# Altium PCB PCB2.PcbDoc
Units mil, origin at the board's own origin, x right, y up, seen from the top; angles counter-clockwise.
Board outline 5905.51 x 3149.61 mil, 2 copper layers (Top Layer, Bottom Layer); 28 components, 86 nets, 114 pads, 2 vias.
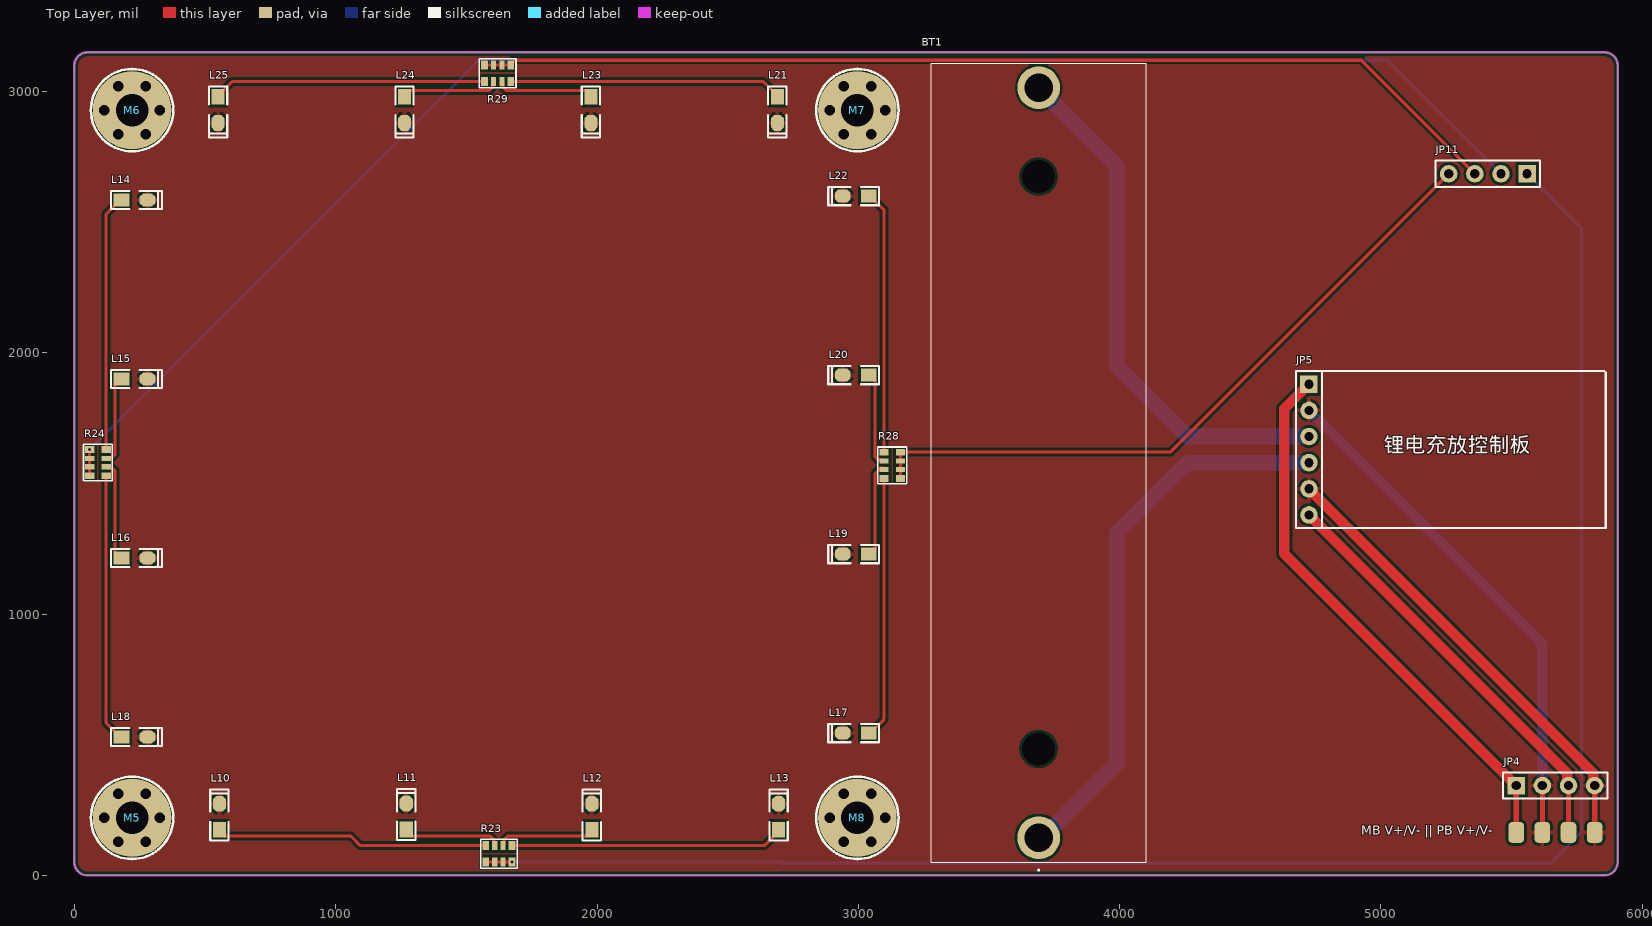
[diagram p0: Top Layer view]
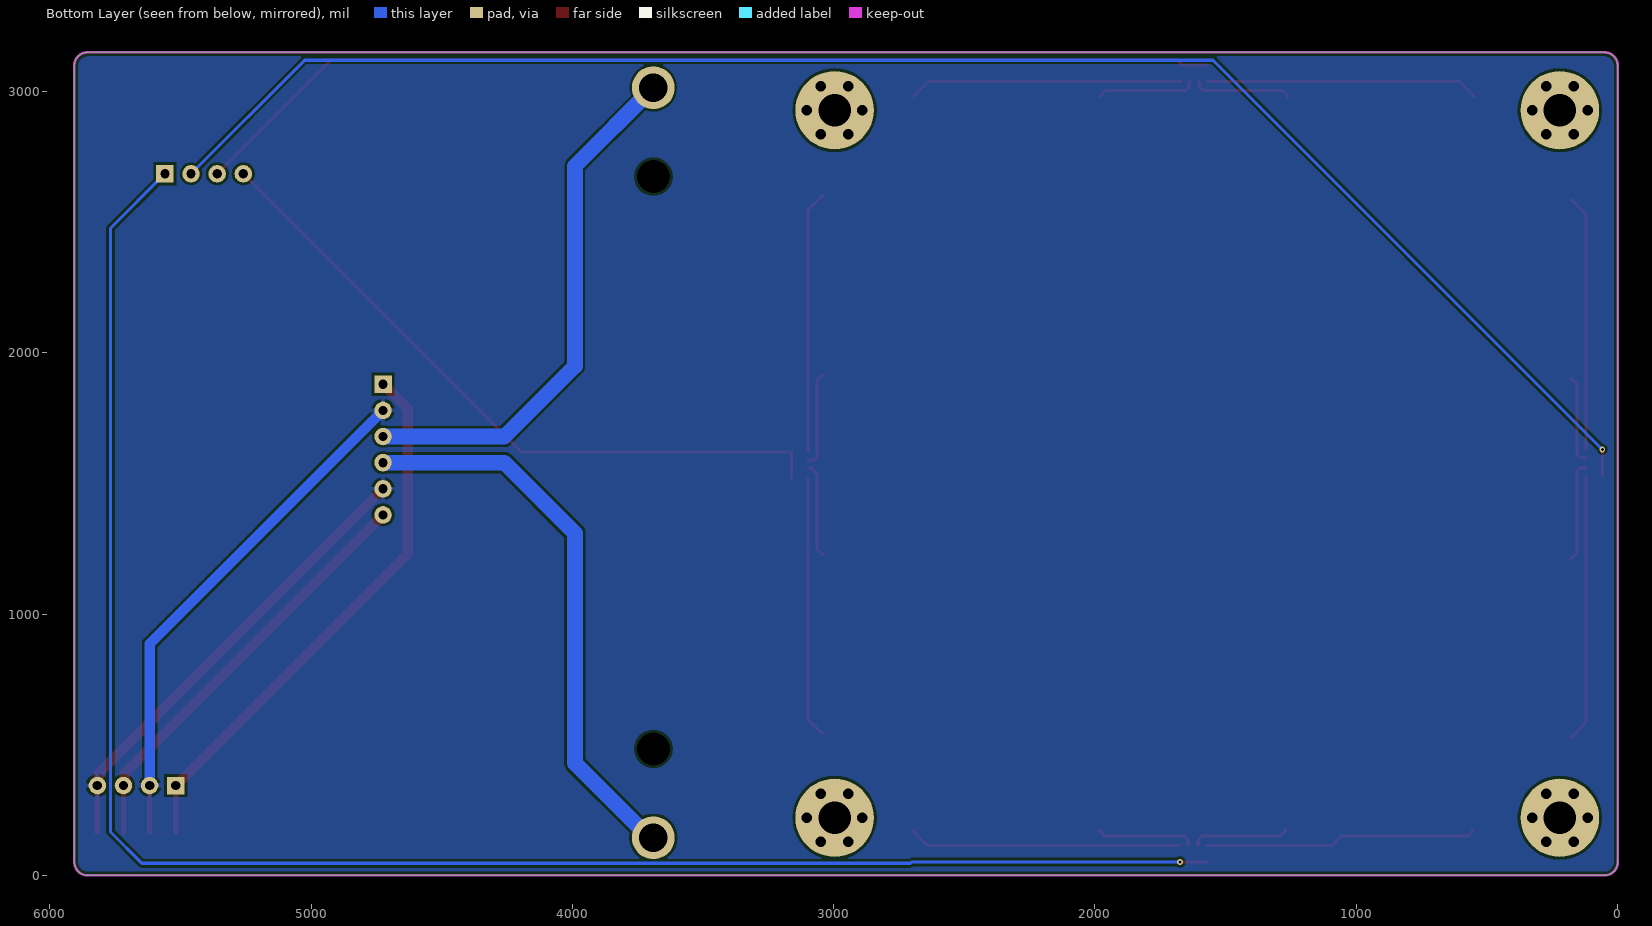
[diagram p1: Bottom Layer view, seen from below]

## Layer stack, top to bottom
Top Solder: solder mask 0.4, Solder Resist, Dk 3.5
Top Layer: signal copper 1.4
Dielectric 1: dielectric 12.6, FR-4, Dk 4.8
Bottom Layer: signal copper 1.4
Bottom Solder: solder mask 0.4, Solder Resist, Dk 3.5

## Board outline
50,0.39 cw(c50,50.39) 0,50.39 0,3100 cw(c50,3100) 50,3150 5855.51,3150 cw(c5855.51,3100) 5905.51,3100 5905.51,50.61 5905.3,50.39 cw(c5855.3,50.39) 5855.3,0.39

## Design rules (kind name [scope] priority, off if disabled: settings)
Clearance [All] p1: gap=10 ignorepadtopadclearanceinfootprint=FALSE except(0: Arc-Hole Track-Hole SMDPad-Hole THPad-Hole Via-Hole Fill-Hole Poly-Hole Region-Hole Text-Hole)
PolygonConnect [All] p1: connectstyle=Relief reliefconductorwidth=16 reliefentries=4 polygonreliefangle="90 Angle" airgapwidth=10
RoutingVias [All] p1: holewidth=28 width=50 viastyle="Through Hole" minholewidth=28 minwidth=50 maxholewidth=28 maxwidth=50
SolderMaskExpansion [All] p1: expansion=4
Width [All] p1: maxlimit=60 minlimit=10 preferedwidth=12
30 further rules are at their usual default settings.

## Components (designator, comment, footprint, x,y, rotation, side; value= is the part's Value field where it differs from the comment)
BT1 "18650" 18650_battery 3690,144.65 r90 top
JP4 "HDR-1X4" HDR2.54-M-LI-4P 5667.56,344.41 r0 top
JP5 "HDR-1X6" HDR2.54-M-LI-6P 4724.41,1630 r270 top
JP11 "HDR-1X4" HDR2.54-LI-4P 5409.06,2685.43 r180 top
L10 "LED" "LED 0805G" 555,224.65 r90 top
L11 "LED" "LED 0805G" 1270,225.88 r90 top
L12 "LED" "LED 0805G" 1980,224.65 r90 top
L13 "LED" "LED 0805G" 2695,224.65 r90 top
L14 "LED" "LED 0805G" 230,2585 r0 top
L15 "LED" "LED 0805G" 230,1900 r0 top
L16 "LED" "LED 0805G" 230,1215 r0 top
L17 "LED" "LED 0805G" 2989.72,545 r180 top
L18 "LED" "LED 0805G" 230,530 r0 top
L19 "LED" "LED 0805G" 2989.72,1230 r180 top
L20 "LED" "LED 0805G" 2989.72,1915 r180 top
L21 "LED" "LED 0805G" 2690,2930 r270 top
L22 "LED" "LED 0805G" 2989.72,2600 r180 top
L23 "LED" "LED 0805G" 1976.67,2930 r270 top
L24 "LED" "LED 0805G" 1263.33,2930 r270 top
L25 "LED" "LED 0805G" 550,2930 r270 top
M5 "M3" M3x20_N 220.83,220.81 r0 top
M6 "M3" M3x20_N 220.83,2928.77 r0 top
M7 "M3" M3x20_N 2996.43,2928.77 r0 top
M8 "M3" M3x20_N 2996.43,220.81 r0 top
R23 "103" RCA-8P4R-0603 1624.25,83.15 r0 top
R24 "103" RCA-8P4R-0603 90,1580 r270 top
R28 "103" RCA-8P4R-0603 3130,1570 r90 top
R29 "103" RCA-8P4R-0603 1620,3070 r180 top

## Footprints (in the part's own frame and the unit in brackets; to place one, negate y for a bottom-side part, rotate by r counter-clockwise, add the part's x,y. Pads: shape width x height; smd on the part's side, far side on the other; paste and mask are expansions set on the pad)
18650_battery [mm] "小糖豆的小窝窝 https://item.taobao.com/item.htm?ft=t&id=613637044352"
  round 4.155 hole 2.77: 1(0,0) 2(72.9,0)
  round 1.6 hole 3.2 unplated: MH1(8.645,0) MH2(64.255,0)
  silkscreen extent -3.2,-10.45 75.3,10.45, body extent -2.38,-10.41 75.27,10.39, height 21.83
HDR2.54-LI-4P [mm] "排针，4脚"
  rect 1.7x1.7 hole 0.9: 1(-3.81,0)
  round 1.7 hole 0.9: 2(-1.27,0) 3(1.27,0) 4(3.81,0)
  silkscreen extent -5.08,-1.27 5.08,1.27, body extent -5.08,-1.27 5.08,1.27, height 8.5
HDR2.54-M-LI-4P [mm] "排母，4脚"
  rect 1.7x1.7 hole 0.9: 1(-3.81,0)
  round 1.7 hole 0.9: 2(-1.27,0) 3(1.27,0) 4(3.81,0)
  silkscreen extent -5.08,-1.27 5.08,1.27, body extent -5.08,-1.27 5.08,1.27, height 8.5
HDR2.54-M-LI-6P [mm] "排母，6脚"
  rect 1.7x1.7 hole 0.9: 1(-6.35,0)
  round 1.7 hole 0.9: 2(-3.81,0) 3(-1.27,0) 4(1.27,0) 5(3.81,0) 6(6.35,0)
  silkscreen extent -7.62,-1.27 7.62,1.27, body extent -7.62,-1.27 7.62,1.27, height 8.5
"LED 0805G" [mil] "绿色0805LED https://item.taobao.com/item.htm?ft=t&id=613637044352"
  rect 60x50 smd: 1(-50,0)
  oct 60x50 smd: 2(50,0)
  silkscreen extent -90,-35 105,35, body extent -39,-25 39,25, height 32
M3x20_N [mil] "M3铜柱，长：20mm"
  round 40 hole 40: 1(-106,0) 1(-53,-91.8) 1(-53,91.8) 1(53,-91.8) 1(53,91.8) 1(106,0)
  round 300 hole 125: 1(0,0)
  silkscreen extent -157,-157 157,157, body extent -106,-93 106,93, height 789
RCA-8P4R-0603 [mm] "3.2mm*1.6mm*0.6mm(长*宽*厚)"
  rect 0.65x0.9 smd: 1(-1.28,-0.8) 4(1.28,-0.8) 5(1.28,0.8) 8(-1.28,0.8)
  rect 0.5x0.9 smd: 2(-0.4,-0.8) 3(0.4,-0.8) 6(0.4,0.8) 7(-0.4,0.8)
  silkscreen extent -1.78,-1.4 1.78,1.4, body extent -1.6,-0.8 1.6,0.8, height 0.6

## Part data
BT1: "Battery", BOM名称=18650, 下单链接=https://item.taobao.com/item.htm?ft=t&id=613637044352, 淘宝ID=小糖豆的小窝窝
JP4 JP11: library part "Header 4", "4P接插件", BOM名称=4P接插件, 下单链接=https://item.taobao.com/item.htm?ft=t&id=613637044352, 淘宝ID=小糖豆的小窝窝
JP5: library part "Header 6", "6P接插件", BOM名称=6P接插件, 下单链接=https://item.taobao.com/item.htm?ft=t&id=613637044352, 淘宝ID=小糖豆的小窝窝
L10 L11 L12 L13 L14 L15 L16 L17 L18 L19 L20 L21 L22 L23 L24 L25: "发光二极管"
M5 M6 M7 M8: "铜柱孔", BOM名称=铜柱孔, 下单链接=https://item.taobao.com/item.htm?ft=t&id=613637044352, 淘宝ID=小糖豆的小窝窝
R23 R24 R28 R29: library part R-8P4R, "贴片排阻", BOM名称=贴片排阻, 下单链接=https://item.taobao.com/item.htm?ft=t&id=613637044352, 淘宝ID=小糖豆的小窝窝

## Free pads (board coordinates)
  rrect50% 60x80 smd: 6(5517.56,165) 6(5617.56,165) 6(5717.56,165) 6(5817.56,165)

## Via types
v1: diameter 22, hole 12, Top Layer to Bottom Layer, tented both sides, 2 vias

## Nets (pads, with @x,y where several pads share a name; then routed paths per layer and width w, separated by ;. In a path a pad name is that pad's centre, name@x,y a point inside that pad or via, vN(x,y) a via of type N, cw(c..) or ccw(c..) an arc to the next point about the centre after c; other vN are vias at no path point)
3V3: 
BEEP: 
"BT V+": BT1.1 JP5.4 | length 2144.4
  Bottom Layer w60: BT1.1 3704.65,144.65 3990,430 3990,1310 4260,1580 JP5.4
"BT V-": BT1.2 JP5.3 | length 2035.2
  Bottom Layer w60: BT1.2 3990,2714.72 3990,1950 4260,1680 JP5.3
D_N: 
D_P: 
Data: 
DTR: 
F8050: 
Fan: 
GND: JP4.2 JP4.4 JP5.2 JP5.5 L10.2 L11.2 L12.2 L13.2 L14.2 L15.2 L16.2 L17.2 L18.2 L19.2 L20.2 L21.2 L22.2 L23.2 L24.2 L25.2 pad.6@5617.56,165 pad.6@5817.56,165 | length 3752.8
  Top Layer w20: pad.6@5617.56,165 JP4.2 ; pad.6@5817.56,165 JP4.4
  Top Layer w40: JP5.5 5812.41,392 5812.41,349.56 JP4.4
  Bottom Layer w40: JP5.2 5617.56,886.85 JP4.2
IO0: 
IO2: 
IO12: 
IO13: 
IO14: 
IO15: 
IO16: 
LED1: JP11.1 R23.1 R23.2 R23.3 R23.4 | length 6849.6
  Top Layer w12: R23.1 R23.2 R23.3 v1(1674.65,51.65)
  Bottom Layer w12: v1(1674.65,51.65) 2701.53,51.65 2706.33,46.85 5647.07,46.85 5767.02,166.81 5767.02,2477.46 JP11.1
LED2: JP11.2 R24.1 R24.2 R24.3 R24.4 | length 6298.4
  Top Layer w12: R24.4 R24.3 R24.2 v1(58.5,1630.39)
  Bottom Layer w12: v1(58.5,1630.39) 1548.11,3120 5024.49,3120 JP11.2
LED3: JP11.3 R29.1 R29.2 R29.3 R29.4 | length 3979.6
  Top Layer w12: R29.4 R29.3 R29.2 R29.1 1670.39,3105.72 1684.67,3120 4924.49,3120 JP11.3
LED4: JP11.4 R28.1 R28.2 R28.3 R28.4 | length 2639.5
  Top Layer w12: R28.1 R28.2 R28.3 R28.4 4194.02,1620.39 JP11.4
"MB V+": JP4.1 JP5.1 pad.6@5517.56,165 | length 2121.7
  Top Layer w20: pad.6@5517.56,165 JP4.1
  Top Layer w40: JP5.1 4630,1785.59 4630,1231.97 JP4.1
NetD1_2: 
NetL1_1: 
NetL2_1: 
NetL3_1: 
NetL4_1: 
NetL5_1: 
NetL6_1: 
NetL7_1: 
NetL8_2: 
NetL9_2: 
NetL10_1: L10.1 R23.8 | length 1046.6
  Top Layer w12: L10.1 555,169.65 574,150.65 1058.39,150.65 1094.39,114.65 R23.8
NetL11_1: L11.1 R23.7 | length 377.6
  Top Layer w12: L11.1 1270,170.88 1289,151.88 1589.76,151.88 1604.66,136.98 1604.66,118.49 R23.7
NetL12_1: L12.1 R23.6 | length 378.6
  Top Layer w12: R23.6 1643.84,118.49 1643.84,136.98 1657.51,150.65 1961,150.65 1980,169.65 L12.1
NetL13_1: L13.1 R23.5 | length 1048.1
  Top Layer w12: R23.5 2640,114.65 2695,169.65 L13.1
NetL14_1: L14.1 R24.8 | length 981.8
  Top Layer w12: R24.8 121.5,2531.5 175,2585 L14.1
NetL15_1: L15.1 R24.7 | length 342.2
  Top Layer w12: R24.7 125.34,1599.59 143.83,1599.59 156,1611.76 156,1881 175,1900 L15.1
NetL16_1: L16.1 R24.6 | length 387.2
  Top Layer w12: R24.6 125.34,1560.41 143.83,1560.41 156,1548.24 156,1234 175,1215 L16.1
NetL17_1: L17.1 R28.8 | length 1001.9
  Top Layer w12: L17.1 3044.72,545 3098.5,598.78 R28.8
NetL18_1: L18.1 R24.5 | length 1026.8
  Top Layer w12: R24.5 121.5,583.5 175,530 L18.1
NetL19_1: L19.1 R28.7 | length 364.7
  Top Layer w12: L19.1 3044.72,1230 3063.72,1249 3063.72,1537.97 3085.66,1559.91 R28.7@3098.5,1559.91
NetL20_1: L20.1 R28.6 | length 367.4
  Top Layer w12: L20.1 3044.72,1915 3063.72,1896 3063.72,1602.03 3076.17,1589.59 3094.66,1589.59 R28.6
NetL21_1: L21.1 R29.8 | length 1046.8
  Top Layer w12: R29.8 2636.5,3038.5 2690,2985 L21.1
NetL22_1: L22.1 R28.5 | length 1006.9
  Top Layer w12: L22.1 3044.72,2600 3098.5,2546.22 R28.5
NetL23_1: L23.1 R29.7 | length 378.9
  Top Layer w12: R29.7 1639.59,3034.66 1639.59,3016.17 1651.76,3004 1957.67,3004 1976.67,2985 L23.1
NetL24_1: L24.1 R29.6 | length 378.9
  Top Layer w12: L24.1 1263.33,2985 1282.33,3004 1588.24,3004 1600.41,3016.17 1600.41,3034.66 R29.6
NetL25_1: L25.1 R29.5 | length 1046.8
  Top Layer w12: L25.1 550,2985 603.5,3038.5 R29.5
NetLS1_1: 
NetQ1_1: 
NetQ2_1: 
NetQ3_1: 
NetQ4_1: 
NetR1_1: 
NetR2_1: 
NetR3_1: 
NetR10_6: 
NetR10_7: 
NetR25_1: 
NetR26_1: 
NetR27_1: 
P1.0: 
P1.1: 
P1.2: 
P1.3: 
P1.4: 
P2.0: 
P2.1: 
P2.2: 
P2.3: 
P2.4: 
P2.5: 
"PB V+": JP4.3 JP5.6 pad.6@5717.56,165 | length 1626.4
  Top Layer w20: pad.6@5717.56,165 JP4.3
  Top Layer w40: JP5.6 5712.41,392 5712.41,349.56 JP4.3
RST-12F: 
RST-51: 
RTS: 
RXD-340: 
TXD-340: 
V3: 
VCC: 
VIn: 
W8050: 
Water: 
XTAL1: 
XTAL2: 
pads on no net: BT1.MH1 BT1.MH2 M5.1 M6.1 M7.1 M8.1

## Polygon pours and split planes (outlines as drawn)
GND on Top Layer "Top Layer-No Net" (solid, pour order 4): 0,3100 cw(c50,3100) 50,3150 5855.51,3150 cw(c5855.51,3100) 5905.51,3100 5905.51,50.61 cw(c5855.3,50.61) 5855.3,0.39 50,0.39 cw(c50,50.39) 0,50.39
GND on Bottom Layer "Bottom Layer-No Net" (solid, pour order 6): 0,3100 cw(c50,3100) 50,3150 5855.51,3150 cw(c5855.51,3100) 5905.51,3100 5905.51,50.61 cw(c5855.3,50.61) 5855.3,0.39 50,0.39 cw(c50,50.39) 0,50.39

## Keep-outs
Keep-Out Layer:
  lines w10: 5905.3,50.39 cw(c5855.3,50.39) 5855.3,0.39 50,0.39 cw(c50,50.39) 0,50.39 0,3100 cw(c50,3100) 50,3150 5855.51,3150 cw(c5855.51,3100) 5905.51,3100 5905.51,50.61

## Silkscreen, mask and mechanical layers (free items; w line width, h text height)
Top Overlay:
  lines w8: 4774.41,1330 5860,1330 5860,1925 5855,1930 4774.41,1930
  text "锂电充放控制板" at 5010,1600 h100
  text "MB V+/V- || PB V+/V-" at 4925,145 h60
Mechanical 1:
  lines w10: 5905.3,50.39 cw(c5855.3,50.39) 5855.3,0.39 50,0.39 cw(c50,50.39) 0,50.39 0,3100 cw(c50,3100) 50,3150 5855.51,3150 cw(c5855.51,3100) 5905.51,3100 5905.51,50.61

## Dimensions
50,0.39 to 50,3150 on Mechanical 1
5905.51,50.61 to 0,50.39 on Mechanical 1